# EAGLE board TracKat  Module - Weight (EAGLE 9.6.2)
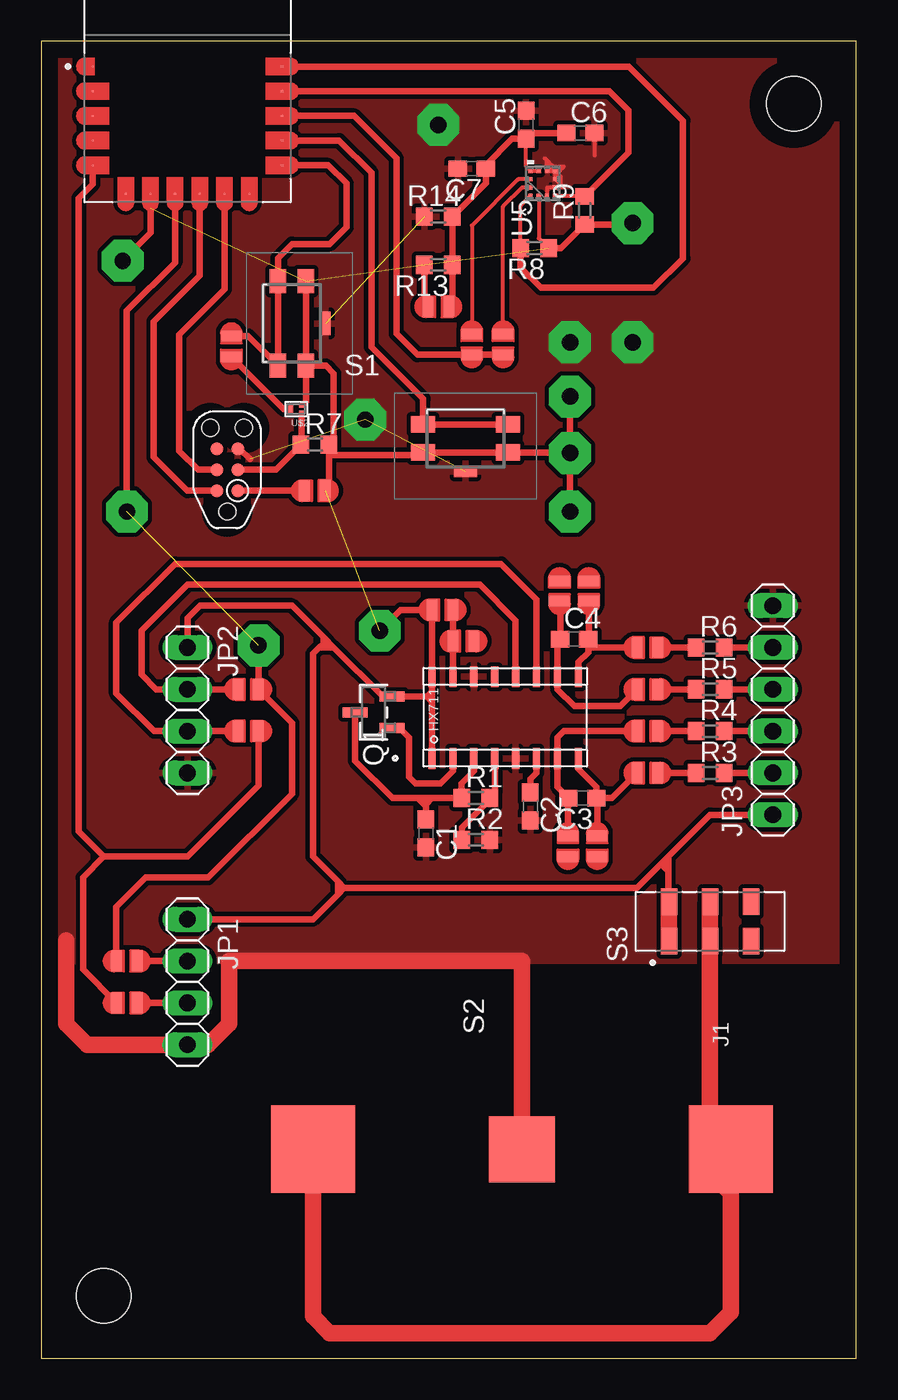
[diagram p0: board, top side]

Size 49.53 x 80.01 mm. Coordinates in mm from the lower left corner, seen from the top.
Outline: 0,0 49.53,0 49.53,80.01 0,80.01 0,0
Copper layers (1*16): Top 0.035mm / dielectric 1.5mm / Bottom 0.035mm
Design rules "default": minimum track width 6mil, minimum drill 0.35mm, track to track 6mil, track to pad 6mil, pad to pad 6mil, via to via 6mil, smd to smd 6mil, copper to edge 40mil, drill to drill 6mil, minimum pad ring 10mil, minimum via ring 8mil, stop-mask expansion 4mil, vias tented up to drill 0mil, thermal gap 10mil
Holes 3.3 mm at 45.72,76.2 3.81,3.81

## Footprints (pad centres in the part's own frame; a part is rotated, then mirrored left to right if it is on the bottom)
BH-67A-5 = smd 3.988 x 3.988: N1 0,0 | smd 5.105 x 5.309: P1 -12.7,0; P2 12.7,0
C0603 = smd 1.1 x 1: 1 -0.85,0; 2 0.85,0
TC2030-IDC-NL = smd 0.787 x 0.787: 1 -1.27,-0.635; 2 -1.27,0.635; 3 0,-0.635; 4 0,0.635; 5 1.27,-0.635; 6 1.27,0.635 | hole 1.016: -2.54,0; 2.54,1.016; 2.54,-1.016
1X04 = drill 1.016 long: 1 -3.81,0; 2 -1.27,0; 3 1.27,0; 4 3.81,0
1X06 = drill 1.016 long: 1 -6.35,0; 2 -3.81,0; 3 -1.27,0; 4 1.27,0; 5 3.81,0; 6 6.35,0
SOT-23_MCC-M = smd 0.61 x 1.524: 1 -0.953,-1.118; 2 0.953,-1.118; 3 0,1.118
R0603 = smd 1 x 1.1: 1 -0.85,0; 2 0.85,0
EVQP9102W = smd 1 x 1.45: 1 -0.85,2.575; 2 0.85,2.575; 3 -0.85,-2.575; 4 0.85,-2.575 | smd 0.65 x 1.4: 5 -2.025,0
SW_JS202011JCQN = smd 1.6 x 1: 1 -1.2,2.5; 2 -1.2,0; 3 -1.2,-2.5; 5 1.2,2.5; 6 1.2,0; 7 1.2,-2.5
SMD_JUMPER = smd 1.27 x 0.635: P$1 0,0.635; P$2 0,-0.635
XCVR_DA14531MOD-00F01002 = smd 0.1 x 0.1: J1 -5.75,1; J2 -5.75,-0.5; J3 -5.75,-2; J4 -5.75,-3.5; J5 -5.75,-5; J6 -3.75,-6.75; J7 -2.25,-6.75; J8 -0.75,-6.75; J9 0.75,-6.75; J10 2.25,-6.75; J11 3.75,-6.75; J12 5.75,-5; J13 5.75,-3.5; J14 5.75,-2; J15 5.75,-0.5; J16 5.75,1
LGA_DTW12_STM = smd 0.279 x 0.254: 1 -0.762,0.75; 2 -0.762,0.25; 3 -0.762,-0.25; 4 -0.762,-0.75; 7 0.762,-0.75; 8 0.762,-0.25; 9 0.762,0.25; 10 0.762,0.75 | smd 0.254 x 0.279: 5 -0.25,-0.762; 6 0.25,-0.762; 11 0.25,0.762; 12 -0.25,0.762
HX711 = smd 1.27 x 0.439: AGND 0.508,4.318; AVDD 0.508,6.858; BASE 0.508,8.128; DOUT 5.461,4.318; DVDD 5.461,9.398; INNA 0.508,1.778; INNB 5.461,0.508; INPA 0.508,0.508; INPB 5.461,1.778; PD_SCK 5.461,3.048; RATE 5.461,8.128; VBG 0.508,3.048; VFB 0.508,5.588; VSUP 0.508,9.398; XI 5.461,6.858; XO 5.461,5.588
DFN985X585X50-3N = smd 0.29 x 0.18: 1 -0.325,0.175; 2 -0.325,-0.175 | smd 0.29 x 0.53: 3 0.325,0

## Placement (x,y rotation side)
B$1  BH-67A-5  [BH-67A-5]  29.21,12.7 180 top
C1  10uF  [C0603]  23.37,31.88 270 top
C2  0.1uF  [C0603]  29.72,33.53 270 top
C3  0.1uF  [C0603]  32.89,34.04 180 top
C4  0.1uF  [C0603]  32.38,43.69 0 top
C5  10uF  [C0603]  29.46,74.93 90 top
C6  100nF  [C0603]  32.77,74.42 0 top
C7  100nF  [C0603]  26.16,72.26 180 top
J1  TC2030-CTX-NL  [TC2030-IDC-NL]  11.3,53.98 90 top
JP1  [1X04]  8.89,22.86 270 top
JP2  [1X04]  8.89,39.37 270 top
JP3  [1X06]  44.45,39.37 90 top
Q1  MMSS8550-H-TPSOT-23_MCC-M  [SOT-23_MCC-M]  20.19,39.24 90 top
R1  [R0603]  26.42,34.04 0 top
R2  [R0603]  26.42,31.5 0 top
R3  100  [R0603]  40.64,35.56 0 top
R4  100  [R0603]  40.64,38.1 0 top
R5  100  [R0603]  40.64,40.64 0 top
R6  100  [R0603]  40.64,43.18 0 top
R7  10K  [R0603]  16.64,55.5 0 top
R8  [R0603]  29.97,67.44 180 top
R9  [R0603]  33.02,69.72 90 top
R13  1K  [R0603]  24.13,66.42 180 top
R14  1.5K  [R0603]  24.13,69.34 0 top
S1  EVQ-P9102W  [EVQP9102W]  15.24,62.87 180 top
S2  EVQ-P9102W  [EVQP9102W]  25.78,55.88 90 top
S3  JS202011JCQN  [SW_JS202011JCQN]  40.64,26.54 90 top
SB$1  SMD_JUMPER  [SMD_JUMPER]  36.83,35.56 90 top
SB$2  SMD_JUMPER  [SMD_JUMPER]  36.83,38.1 90 top
SB$3  SMD_JUMPER  [SMD_JUMPER]  36.83,40.64 90 top
SB$4  SMD_JUMPER  [SMD_JUMPER]  36.83,43.18 90 top
SB$5  SMD_JUMPER  [SMD_JUMPER]  32,31.11 0 top
SB$6  SMD_JUMPER  [SMD_JUMPER]  33.78,31.11 0 top
SB$7  SMD_JUMPER  [SMD_JUMPER]  31.5,46.61 180 top
SB$8  SMD_JUMPER  [SMD_JUMPER]  33.27,46.61 180 top
SB$9  SMD_JUMPER  [SMD_JUMPER]  24.38,45.47 90 top
SB$10  SMD_JUMPER  [SMD_JUMPER]  25.65,43.56 90 top
SB$11  SMD_JUMPER  [SMD_JUMPER]  5.21,24.13 270 top
SB$12  SMD_JUMPER  [SMD_JUMPER]  12.57,40.64 90 top
SB$13  SMD_JUMPER  [SMD_JUMPER]  26.16,61.59 180 top
SB$14  SMD_JUMPER  [SMD_JUMPER]  24.13,63.88 270 top
SB$15  SMD_JUMPER  [SMD_JUMPER]  28.07,61.59 180 top
SB$16  SMD_JUMPER  [SMD_JUMPER]  16.64,52.7 270 top
SB$17  SMD_JUMPER  [SMD_JUMPER]  11.56,61.47 0 top
SB$18  SMD_JUMPER  [SMD_JUMPER]  5.21,21.59 270 top
SB$19  SMD_JUMPER  [SMD_JUMPER]  12.57,38.1 90 top
U1  DA14531MOD-00F01002  [XCVR_DA14531MOD-00F01002]  8.89,77.47 0 top
U5  LIS2DTW12TR  [LGA_DTW12_STM]  30.48,71.37 90 top
U$1  HX711  [HX711]  33.15,35.94 90 top
U$2  BSS84AKM,315  [DFN985X585X50-3N]  15.49,57.66 180 top

## Library data of the parts
B$1 = Coin Cell Clips
C1-C7 = rcl; SPICEPREFIX: C
J1 = TC2030-CTX; AVAILABILITY: In Stock; DESCRIPTION: Cortex® Plug-Of-Nails™ Adapter Cable; MF: Tag-Connect LLC; MP: TC2030-CTX; PACKAGE: None; PRICE: None; PURCHASE-URL: https://pricing.snapeda.com/search/part/TC2030-CTX/?ref=eda
JP1-JP3 = pinhead
Q1 = MMSS8550-H-TP; COPYRIGHT: Copyright (C) 2021 Ultra Librarian. All rights reserved.; DIGI-KEY_PART_NUMBER_1: MMSS8550-H-TPMSTR-ND; DIGI-KEY_PART_NUMBER_2: MMSS8550-H-TPMSCT-ND; DIGI-KEY_PART_NUMBER_3: MMSS8550-H-TPMSDKR-ND; MANUFACTURER_PART_NUMBER: MMSS8550-H-TP; MFR_NAME: MCC
R1-R9 R13 R14 = rcl; SPICEPREFIX: R
S1 S2 = EVQ-P9102W; ARROW_PART_NUMBER: EVQ-P9102W; ARROW_PRICE-STOCK: https://www.arrow.com/en/products/evq-p9102w/panasonic; DESCRIPTION: Tactile Switches 4.7x3.52.5mm 4N With Grnd Term; HEIGHT: 2.5mm; MANUFACTURER_NAME: Panasonic; MANUFACTURER_PART_NUMBER: EVQ-P9102W; MOUSER_PART_NUMBER: 667-EVQ-P9102W; MOUSER_PRICE-STOCK: https://www.mouser.co.uk/ProductDetail/Panasonic/EVQ-P9102W?qs=PzGy0jfpSMvUc6TfsFZ%2Fsg%3D%3D
S3 = JS202011JCQN; DESCRIPTION: Slide Switch DPDT Surface Mount; DIGI-KEY_PART_NUMBER: CKN10723CT-ND; MF: C&K; MP: JS202011JCQN; PACKAGE: DPDT-6 C&amp;K; PURCHASE-URL: https://pricing.snapeda.com/search/part/JS202011JCQN/?ref=eda
SB$1-SB$19 = Solder_Jumpers
U1 = DA14531MOD-00F01002; DESCRIPTION: Bluetooth Bluetooth v5.1 Transceiver Module 2.4GHz ~ 2.4835GHz Integrated, Trace Surface Mount; DIGI-KEY_PART_NUMBER: 1695-DA14531MOD-00F01002CT-ND; MF: Dialog Semiconductor GmbH; MP: DA14531MOD-00F01002; PACKAGE: SMD-16 Dialog Semiconductor; PURCHASE-URL: https://pricing.snapeda.com/search/part/DA14531MOD-00F01002/?ref=eda
U5 = Accelerometers; COPYRIGHT: Copyright (C) 2021 Ultra Librarian. All rights reserved.; DIGI-KEY_PART_NUMBER_1: 497-19047-2-ND; DIGI-KEY_PART_NUMBER_2: 497-19047-1-ND; DIGI-KEY_PART_NUMBER_3: 497-19047-6-ND; MANUFACTURER_PART_NUMBER: LIS2DTW12TR; MFR_NAME: STMicroelectronics
U$1 = HX711
U$2 = DFN985X585X50-3N

## Nets
ACCEL_INT: SB$13.P$1 SB$15.P$1 U1.J14
ACCEL_INT1: SB$15.P$2 U5.12
ACCEL_INT2: SB$13.P$2 U5.11
DOUT: JP2.2 SB$12.P$1 U$1.DOUT
DOUT_EXT: JP1.2 SB$11.P$1
GND: B$1.N1 C1.2 C2.2 C5.2 C6.2 C7.2 J1.5 JP1.4 JP2.4 JP3.6 R2.2 R14.1 S1.5 S2.5 SB$5.P$2 SB$6.P$2 SB$7.P$2 SB$8.P$2 SB$10.P$2 U1.J1 U1.J2 U1.J3 U1.J4 U1.J6 U1.J11 U5.3 U5.5 U5.6 U5.7 U5.8 U$1.AGND U$1.XI
INNA: C3.2 SB$2.P$1 SB$5.P$1 U$1.INNA
INNA_SB: R4.1 SB$2.P$2
INNB: C4.2 SB$4.P$1 SB$8.P$1 U$1.INNB
INNB_SB: R6.1 SB$4.P$2
INPA: C3.1 SB$1.P$1 SB$6.P$1 U$1.INPA
INPA_SB: R3.1 SB$1.P$2
INPB: C4.1 SB$3.P$1 SB$7.P$1 U$1.INPB
INPB_SB: R5.1 SB$3.P$2
LC_DATA: SB$11.P$2 SB$12.P$2 U1.J8
LC_SCK: SB$18.P$2 SB$19.P$2 U1.J5
MOSI: S1.2 S1.4 SB$17.P$1 U1.J12
N$1: R1.2 R2.1 U$1.VFB
N$2: Q1.1 U$1.BASE
N$5: C1.1 Q1.3 R1.1 U$1.AVDD
N$7: C2.1 U$1.VBG
N$9: JP3.5 R6.2
N$10: JP3.4 R5.2
N$11: JP3.3 R4.2
N$12: JP3.2 R3.2
N$17: C5.1 C6.1 C7.1 R13.1 R14.2 SB$14.P$1 U5.9 U5.10
N$19: J1.1 SB$16.P$2
N$21: SB$17.P$2 U$2.3
RATE: SB$9.P$2 SB$10.P$1 U$1.RATE
RESET_N: J1.3 R7.1 U$2.1
SCK: JP2.3 SB$19.P$1 U$1.PD_SCK
SCK_EXT: JP1.3 SB$18.P$1
SCL: R8.2 U1.J16 U5.1
SDA: R9.2 U1.J15 U5.4
SWCLK: J1.4 U1.J10
SWDIO: J1.2 U1.J9
SWO: J1.6
USER_BTN: S2.2 S2.4 U1.J13
V_BATT: B$1.P1 B$1.P2 S3.2 S3.6
V_HIGH: JP1.1 JP2.1 JP3.1 Q1.2 R7.2 R8.1 R9.1 R13.2 S1.1 S1.3 S2.1 S2.3 S3.1 S3.5 SB$9.P$1 SB$14.P$2 SB$16.P$1 U1.J7 U5.2 U$1.DVDD U$1.VSUP U$2.2

## Tracks (layer width: path | path; a pad name or v marks a point on that pad's centre or on a via)
ACCEL_INT
  Top 0.406: SB$15.P$1 SB$13.P$1 22.86,60.96 21.59,62.23 21.59,72.9 19.02,75.47 U1.J14
ACCEL_INT1
  Top 0.254: U5.12 29.21,71.12 28.07,69.98 SB$15.P$2
ACCEL_INT2
  Top 0.254: U5.11 28.98,71.62 26.16,68.81 SB$13.P$2
DOUT
  Top 0.406: U$1.DOUT 28.83,44.83 26.67,46.99 8.89,46.99 6.1,44.2 6.1,41.53 6.99,40.64 JP2.2 SB$12.P$1
DOUT_EXT
  Top 0.406: JP1.2 SB$11.P$1
GND  (via drill 1 pad 2.54)  (3 unrouted)
  Top 0.254: U5.8 U5.7 | U5.5 | U5.5 30.73,71.12 U5.3 | 31.37,71.5 U5.6 31.23,71.64 U5.7 | 31.37,71.5 31.56,71.31 | 31.56,71.31 31.75,71.12 U5.5 | U5.7 31.48,72.39 | 31.48,72.39 31.75,72.39 31.5,72.14 U5.7 | U5.8 30.73,72.78 | 30.73,72.78 30.61,72.9 | U5.7 31.37,72 31.37,71.5 | U5.7 31.56,71.81 31.56,71.31 | 31.48,72.39 30.98,72.39 U5.8 | C6.2 33.62,73.06 | 31.05,72.46 30.73,72.78
  Top 0.406: J1.5 12.06,55.24 12.7,54.61
  Top 1.016: 1.52,25.4 1.52,20.32 2.79,19.05 JP1.4 10.16,19.05 11.43,20.32 11.43,24.13 29.21,24.13 B$1.N1
  other vias: 24.13,74.93 32.13,61.72 19.68,57.02 35.94,61.72
  pour Top (isolate 0.254): 0,80.01 49.53,80.01 49.53,24.13 0,24.13
INNA
  Top 0.406: SB$5.P$1 32,34 C3.2 31.37,34.71 U$1.INNA 31.37,37.72 31.75,38.1 SB$2.P$1
INNA_SB
  Top 0.406: R4.1 SB$2.P$2
INNB
  Top 0.406: 33.23,43.18 C4.2 33.27,43.73 SB$8.P$1 | 33.23,43.18 33.23,42.89 32.64,42.29 U$1.INNB | SB$4.P$1 33.23,43.18
INNB_SB
  Top 0.406: R6.1 SB$4.P$2
INPA
  Top 0.406: U$1.INPA 32.64,35.81 33.74,34.71 C3.1 | SB$6.P$1 33.78,34 C3.1 | SB$1.P$1 34.67,34.04 C3.1
INPA_SB
  Top 0.406: R3.1 SB$1.P$2
INPB
  Top 0.406: SB$7.P$1 31.54,45.94 C4.1 31.37,43.52 U$1.INPB 31.37,40.64 32.38,39.62 35.18,39.62 SB$3.P$1
INPB_SB
  Top 0.406: R5.1 SB$3.P$2
LC_DATA  (via drill 1 pad 2.54)  (1 unrouted)
  Top 0.406: SB$11.P$2 4.57,27.43 6.35,29.21 10.16,29.21 15.24,34.29 15.24,38.61 SB$12.P$2 v13.21,43.31 | U1.J8 8.14,66.56 5.21,63.63 v5.21,51.44
LC_SCK
  Top 0.406: SB$19.P$2 13.21,34.8 8.89,30.48 3.81,30.48 | 3.81,30.48 2.54,29.21 2.54,23.62 SB$18.P$2 | U1.J5 3.14,71.33 2.29,70.47 2.29,32 3.81,30.48
MOSI
  Top 0.406: U1.J12 17.45,72.47 18.54,71.37 18.54,68.71 17.53,67.69 15.24,67.69 14.39,66.84 S1.4 S1.2 12.58,62.1 SB$17.P$1
N$1
  Top 0.406: U$1.VFB 27.56,34.33 R1.2 27.27,33.96 25.57,32.26 R2.1
N$2
  Top 0.406: Q1.1 21.78,38.29 22.35,37.72 22.35,35.31 22.73,34.92 24.26,34.92 25.02,35.69 U$1.BASE
N$5
  Top 0.406: U$1.AVDD 26.29,35.69 25.53,34.92 25.53,34.08 | 25.53,34.08 R1.1 | Q1.3 19.07,36.3 21.34,34.04 22.86,34.04 | 22.86,34.04 23.75,34.04 | 23.75,34.04 25.49,34.04 25.53,34.08 | 22.86,34.04 23.37,33.53 C1.1 23.37,33.66 23.75,34.04
N$7
  Top 0.406: U$1.VBG 30.1,35.56 29.72,35.18 C2.1
N$9
  Top 0.406: JP3.5 R6.2
N$10
  Top 0.406: JP3.4 R5.2
N$11
  Top 0.406: JP3.3 R4.2
N$12
  Top 0.406: JP3.2 R3.2
N$17
  Top 0.254: C5.1 29.46,72.4 U5.10 U5.9
  Top 0.406: C6.1 29.81,74.42 C5.1 28.61,74.08 27.01,72.48 C7.1 27.01,71.37 R14.2 R13.1 24.98,64.1 SB$14.P$1
N$19
  Top 0.406: J1.1 SB$16.P$2
N$21
  Top 0.254: U$2.3 14.73,57.66
  Top 0.406: 14.73,57.66 SB$17.P$2
RATE
  Top 0.406: U$1.RATE SB$10.P$1 SB$9.P$2
RESET_N
  Top 0.152: 15.82,57.28 U$2.1
  Top 0.406: J1.3 14.26,53.98 R7.1 15.82,55.53 15.82,57.28
SCK
  Top 0.406: U$1.PD_SCK 30.1,46.1 27.94,48.26 8.13,48.26 4.57,44.7 4.57,40.39 6.86,38.1 JP2.3 SB$19.P$1
SCK_EXT
  Top 0.406: JP1.3 SB$18.P$1
SCL
  Top 0.254: R8.2 29.12,70 U5.1
  Top 0.406: R8.2 29.12,66.25 30.35,65.02 37.21,65.02 38.99,66.8 38.99,75.18 35.7,78.47 U1.J16
SDA
  Top 0.254: U5.4 32.98,70.61 R9.2
  Top 0.406: R9.2 35.69,73.24 35.69,75.82 34.54,76.97 U1.J15
SWCLK
  Top 0.406: J1.4 9.53,53.98 8.38,55.12 8.38,62.18 11.14,64.93 U1.J10
SWDIO
  Top 0.406: U1.J9 9.64,65.77 6.85,62.97 6.85,54.74 8.88,52.7 J1.2
USER_BTN
  Top 0.406: U1.J13 18.11,73.97 20.07,72.01 20.07,61.43 23.21,58.29 S2.2 S2.4
V_BATT
  Top 1.016: 40.64,13.97 40.64,11.3 41.91,10.03 41.91,2.79 40.64,1.52 17.53,1.52 16.51,2.54 B$1.P2 | 40.64,13.97 S3.2 S3.6 | B$1.P1 40.64,13.97
V_HIGH  (via drill 1 pad 2.54)  (4 unrouted)
  Top 0.152: 15.95,57.96 U$2.2
  Top 0.254: U5.2 30.23,68.03 R8.1
  Top 0.406: U$1.DVDD SB$9.P$1 21.84,45.47 v20.57,44.2 | 23.43,40.2 Q1.2 20.77,40.2 17.78,43.18 | 23.43,40.2 23.75,40.51 U$1.DVDD | U$1.DVDD 23.75,40.01 | 23.75,40.01 23.75,39.88 | 23.75,39.88 U$1.VSUP | 23.43,40.2 23.56,40.2 23.75,40.01 | 23.43,40.2 23.75,39.88 | JP2.1 8.89,44.96 9.65,45.72 15.24,45.72 17.14,43.81 | 17.78,43.18 16.89,43.18 | 17.78,43.18 17.14,43.81 | 16.89,43.18 16.51,42.8 16.51,30.48 18.03,28.96 | 18.41,28.57 36.2,28.57 37.66,30.04 | 37.66,30.04 38.1,30.48 | 38.1,30.48 40.64,33.02 JP3.1 | 18.41,28.57 18.03,28.96 | 18.41,28.57 18.03,28.19 | 18.03,28.19 18.03,28.96 | R8.1 31.58,67.44 R9.1 35.85,68.87 v35.94,68.96 | SB$14.P$2 23.28,64.1 R13.2 | S1.3 S1.1 | JP1.1 16.51,26.67 18.03,28.19 | S1.1 17.31,60.29 17.78,59.82 17.78,55.79 R7.2 17.49,54.86 | SB$16.P$1 17.49,52.92 17.49,54.86 | 6.64,69.85 U1.J7 6.64,68.36 v4.95,66.67 | v32.13,54.99 32.09,55.03 S2.3 S2.1 23.04,54.86 17.49,54.86 | 16.89,43.18 17.14,43.43 17.14,43.81 | v32.13,58.42 v32.13,54.99 | v32.13,54.99 v32.13,51.44 | S3.5 38.1,27.78 38.1,29.59 | 38.1,29.59 38.1,30.48 | 38.1,29.59 37.66,30.04 | 15.95,57.96 16.09,58.1 S1.1
  Top 1.016: S3.5 S3.1